# EAGLE board WirelessComm (EAGLE 6.5.0)
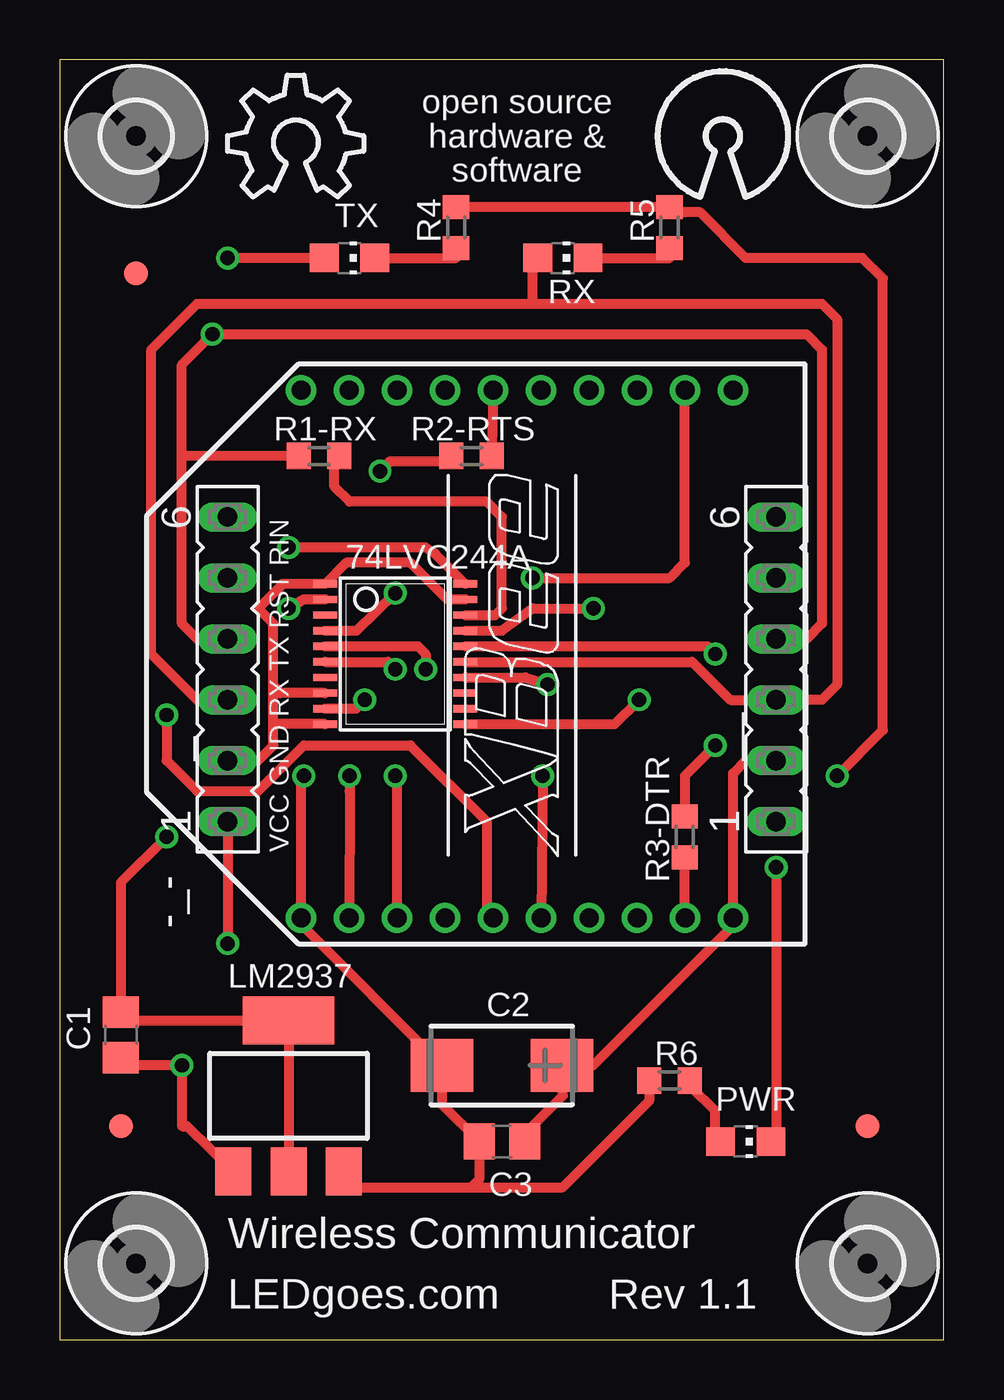
[diagram p0: board, top side]
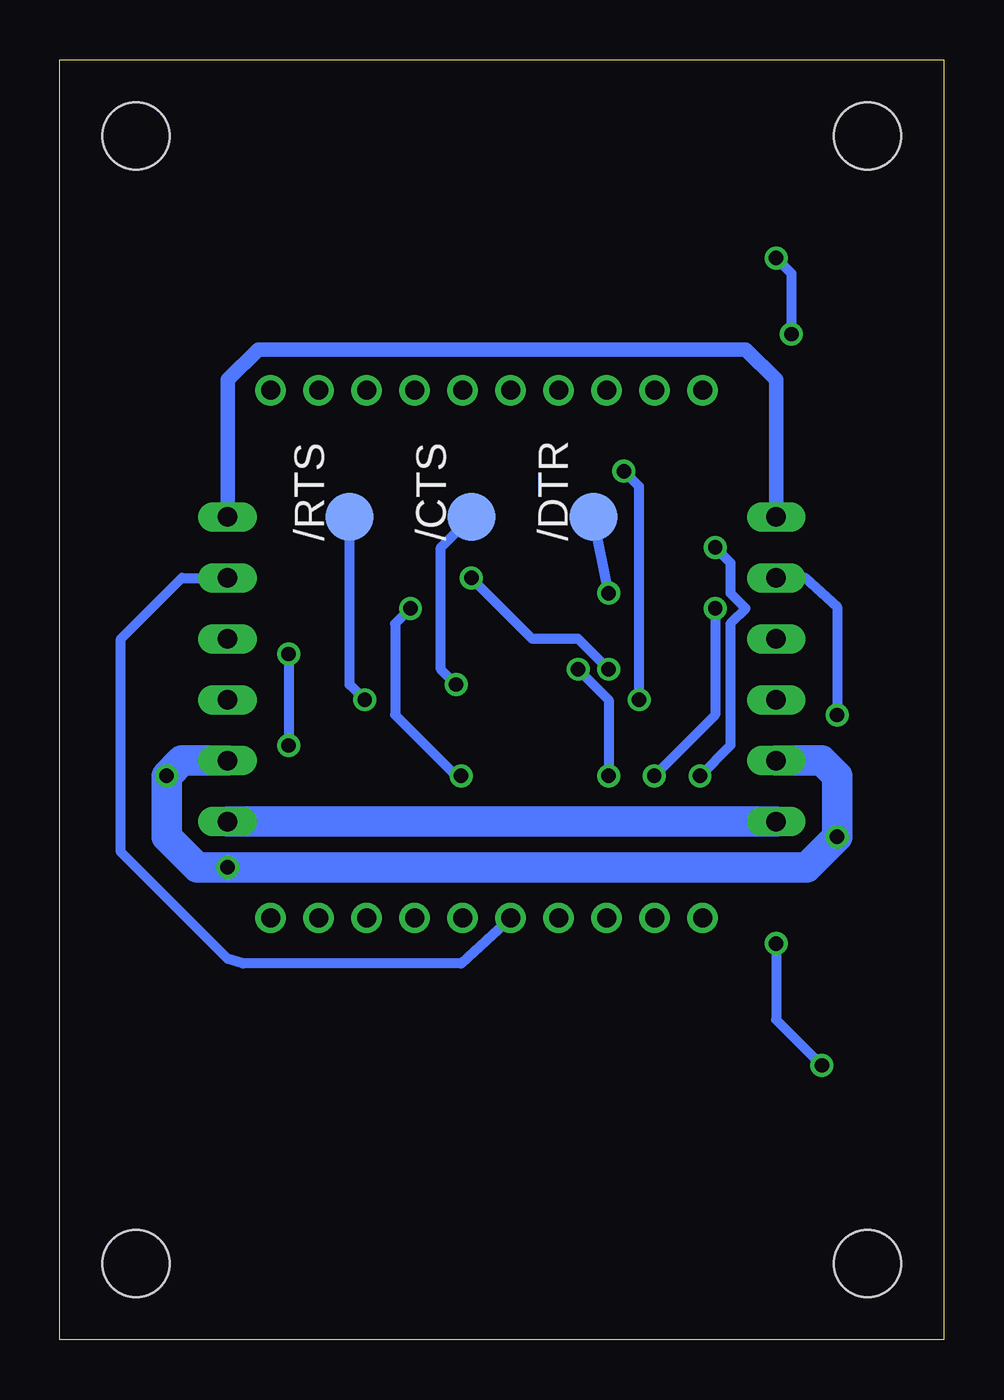
[diagram p1: board, bottom side, seen from below]

Size 36.83 x 53.34 mm. Coordinates in mm from the lower left corner, seen from the top.
Outline: 0,53.34 0,0 36.83,0 36.83,53.34 0,53.34
Copper layers (1*16): Top 0.0356mm / dielectric 1.5011mm / Bottom 0.0356mm
Design rules "LaenPCBOrder *": minimum track width 6mil, minimum drill 13mil, track to track 6mil, track to pad 6mil, pad to pad 6mil, via to via 6mil, smd to smd 6mil, copper to edge 15mil, drill to drill 6mil, minimum pad ring 7mil, minimum via ring 7mil, stop-mask expansion 4mil, vias tented up to drill 0mil, thermal gap 10mil
tKeepout: area 32.2,7.5 to 35.1,10.3; area 1.9,43.2 to 4.4,45.7; area 1.3,7.6 to 3.8,10.2

## Footprints (pad centres in the part's own frame; a part is rotated, then mirrored left to right if it is on the bottom)
TSSOP20 = smd 0.305 x 0.991: 1 -2.925,-2.918; 2 -2.275,-2.918; 3 -1.625,-2.918; 4 -0.975,-2.918; 5 -0.325,-2.918; 6 0.325,-2.918; 7 0.975,-2.918; 8 1.625,-2.918; 9 2.275,-2.918; 10 2.925,-2.918; 11 2.925,2.918; 12 2.275,2.918; 13 1.625,2.918; 14 0.975,2.918; 15 0.325,2.918; 16 -0.325,2.918; 17 -0.975,2.918; 18 -1.625,2.918; 19 -2.275,2.918; 20 -2.925,2.918
XBEE = drill 0.8 pad 1.27: 1 -11,9; 2 -11,7; 3 -11,5; 4 -11,3; 5 -11,1; 6 -11,-1; 7 -11,-3; 8 -11,-5; 9 -11,-7; 10 -11,-9; 11 11,-9; 12 11,-7; 13 11,-5; 14 11,-3; 15 11,-1; 16 11,1; 17 11,3; 18 11,5; 19 11,7; 20 11,9
TP20R = smd 2 x 2: TP 0,0
FE06 = drill 0.813 long: 1 -6.35,0; 2 -3.81,0; 3 -1.27,0; 4 1.27,0; 5 3.81,0; 6 6.35,0
C0805 = smd 1.3 x 1.5: 1 -0.95,0; 2 0.95,0
CT6032 = smd 2.6 x 2.2: + 2.5,0; - -2.5,0
2,8 = hole 2.8: 0,0
FIDUCIAL_1MM = smd 1 x 1: 1 0,0
SOT223 = smd 1.5 x 2: 1 -2.3,-3.15; 2 0,-3.15; 3 2.3,-3.15 | smd 3.8 x 2: 4 0,3.15
CHIP-LED0805 = smd 1.2 x 1.2: A 0,-1.05; C 0,1.05
R0603 = smd 1 x 1.1: 1 -0.85,0; 2 0.85,0

## Placement (x,y rotation side)
74LVC244A  [TSSOP20]  13.97,28.57 270 top
-_-  [XBEE]  19.05,28.57 90 top
/CTS  [TP20R]  19.69,34.29 90 bottom
/DTR  [TP20R]  14.6,34.29 90 bottom
/RTS  [TP20R]  24.77,34.29 90 bottom
_  [FE06]  6.99,27.94 90 top
__  [FE06]  29.84,27.94 90 top
C1  0.1uf  [C0805]  2.54,12.7 90 top
C2  10uf  [CT6032]  18.41,11.43 0 top
C3  0.1uf  [C0805]  18.41,8.25 180 top
E$1  [OSHW_8X200_NOTEXT]  6.99,47.62 0 top
E$2  [2,8]  33.66,50.16 0 top
E$3  [2,8]  3.18,50.16 0 top
E$4  [2,8]  3.18,3.17 0 top
E$5  [2,8]  33.66,3.17 0 top
E$6  [FIDUCIAL_1MM]  3.18,44.45 0 top
E$7  [FIDUCIAL_1MM]  2.54,8.89 0 top
E$8  [FIDUCIAL_1MM]  33.66,8.89 0 top
LM2937  [SOT223]  9.53,10.16 0 top
PWR  [CHIP-LED0805]  28.57,8.25 270 top
R1-RX  1k  [R0603]  10.79,36.83 0 top
R2-RTS  1k  [R0603]  17.15,36.83 0 top
R3-DTR  1k  [R0603]  26.03,20.95 90 top
R4  330  [R0603]  16.51,46.35 90 top
R5  330  [R0603]  25.4,46.35 90 top
R6  330  [R0603]  25.4,10.8 0 top
RX  [CHIP-LED0805]  20.95,45.09 270 top
TX  [CHIP-LED0805]  12.06,45.09 270 top

## Library data of the parts
74LVC244A = mcp2515
-_- = maxstream
/CTS /DTR /RTS = testpad
_ __ = con-lsta
C1 C3 R1-RX R2-RTS R3-DTR R4-R6 = eagle-ltspice
C2 = resistor
E$1 = ohw-logo
E$2-E$5 = holes
E$6-E$8 = adafruit
LM2937 = v-reg
PWR RX TX = led

## Nets
GND: 74LVC244A.1 74LVC244A.8 74LVC244A.10 74LVC244A.19 -_-.10 _.2 __.2 C1.2 C2.+ C3.1 LM2937.2 LM2937.4 PWR.C R4.2 R5.2
S$1: _.6 __.6
S$2: -_-.5 _.5 __.5
S$3: 74LVC244A.20 -_-.1 C2.- C3.2 LM2937.3 R6.1
S$4: 74LVC244A.11 /RTS.TP
S$5: 74LVC244A.14 /CTS.TP
S$6: 74LVC244A.2 -_-.2
S$7: 74LVC244A.18 R1-RX.2
S$8: 74LVC244A.5 -_-.3
S$9: -_-.9 R3-DTR.1
S$10: 74LVC244A.6 -_-.12
S$11: PWR.A R6.2
S$12: -_-.16 R2-RTS.2
S$13: 74LVC244A.9 R2-RTS.1
S$14: R4.1 TX.C
S$15: 74LVC244A.16 R3-DTR.2
S$16: 74LVC244A.17 -_-.6
S$17: 74LVC244A.4 /DTR.TP
S$18: R5.1 RX.C
S$23: 74LVC244A.15 _.3 __.3 RX.A
S$25: _.4 __.4 R1-RX.1 TX.A
VCC: _.1 __.1 C1.1 LM2937.1

## Tracks (layer width: path | path; a pad name or v marks a point on that pad's centre or on a via)
GND  (via drill 0.6)
  Top 0.406: v29.84,19.68 29.84,8.25 PWR.C | v32.38,23.49 34.29,25.4 34.29,44.23 33.44,45.09 28.57,45.09 26.67,46.99 26.03,46.99 R5.2 R4.2 | LM2937.2 LM2937.4 2.88,13.31 C1.2 2.54,19.05 v4.45,20.95 | 74LVC244A.10 8.89,25.65 | 74LVC244A.8 9.17,26.95 8.89,27.3 | 74LVC244A.19 16.14,30.85 14.6,32.38 11.94,32.38 74LVC244A.1 9.28,31.5 8.26,30.48 8.89,29.84 8.89,27.3 | _.2 8.26,24.13 8.89,24.77 8.89,25.65 | 8.89,25.65 8.89,27.3 | __.2 28.57,24.13 28.05,23.61 -_-.10 28.05,17.25 22.23,11.43 C2.+ 20.95,11.39 20.95,10.16 19.37,8.57 C3.1 19.69,8.25
  Bottom 1.27: _.2 5.08,24.13 4.45,23.49 v4.45,20.95 5.71,19.68 v29.84,19.68 31.12,19.68 32.38,20.95 v32.38,23.49 31.75,24.13 __.2
S$1
  Bottom 0.61: _.6 6.99,40.01 8.26,41.27 28.57,41.27 29.84,40.01 __.6
S$2  (via drill 0.6)
  Top 0.406: v4.45,26.04 4.45,24.13 5.71,22.86 8.26,22.86 10.16,24.77 14.6,24.77 17.78,21.59 17.78,17.78 -_-.5
  Bottom 0.406: _.5 5.78,31.75 4.45,30.54 v4.45,26.04 | -_-.5 20.12,15.67 29.21,15.67 29.84,15.88 34.29,20.32 34.29,29.21 31.75,31.75 __.5
S$3  (via drill 0.6)
  Top 0.406: 74LVC244A.20 15.63,32.77 15.24,33.02 v9.53,33.02 | v10.16,23.49 10.05,23.38 -_-.1 10.05,17.3 C2.- 15.92,9.8 C3.2 17.47,6.67 17.15,6.35 | R6.1 24.55,9.95 20.95,6.35 17.15,6.35 | LM2937.3 12.06,6.35 17.15,6.35
  Bottom 0.406: v9.53,33.02 8.89,32.38 8.89,31.11 8.26,30.48 8.89,29.84 8.89,24.77 v10.16,23.49
S$4  (via drill 0.6)
  Top 0.406: 74LVC244A.11 23.11,25.65 v24.13,26.67
  Bottom 0.406: v24.13,26.67 24.77,27.3 /RTS.TP
S$5  (via drill 0.6)
  Top 0.406: 74LVC244A.14 19.39,27.6 v20.32,27.3
  Bottom 0.406: v20.32,27.3 20.95,27.94 20.95,33.02 /CTS.TP
S$6  (via drill 0.6)
  Top 0.406: 74LVC244A.2 10.16,30.85 v9.53,30.48 | v12.06,23.49 12.06,22.86 -_-.2
  Bottom 0.406: v9.53,30.48 9.53,26.04 v12.06,23.49
S$7
  Top 0.406: 74LVC244A.18 18.13,30.2 18.41,30.48 18.41,34.29 17.78,34.92 12.06,34.92 11.43,35.56 11.43,36.83 R1-RX.2
S$8  (via drill 0.6)
  Top 0.406: 74LVC244A.5 14.92,28.9 15.24,28.57 v15.24,27.94 | -_-.3 14.05,23.41 v13.97,23.49
  Bottom 0.406: v15.24,27.94 13.97,26.67 v13.97,23.49
S$9
  Top 0.406: -_-.9 26.03,17.78 R3-DTR.1
S$10  (via drill 0.6)
  Top 0.406: 74LVC244A.6 13.66,28.25 v13.97,27.94 | v19.69,31.75 25.4,31.75 26.03,32.38 26.03,39.37 25.84,39.37 -_-.12
  Bottom 0.406: v13.97,27.94 15.24,29.21 17.15,29.21 v19.69,31.75
S$11
  Top 0.406: R6.2 26.25,10.58 27.3,9.53 27.3,8.25 PWR.A
S$12
  Top 0.406: -_-.16 17.99,37.2 R2-RTS.2
S$13  (via drill 0.6)
  Top 0.406: 74LVC244A.9 12.33,26.3 v12.7,26.67 | v13.33,36.2 13.76,36.62 15.88,36.62 R2-RTS.1
  Bottom 0.406: v12.7,26.67 12.7,35.56 v13.33,36.2
S$14
  Top 0.406: TX.C 16.51,45.09 R4.1
S$15  (via drill 0.6)
  Top 0.406: 74LVC244A.16 26.98,28.9 v27.3,28.57 | v27.3,24.77 26.03,23.49 R3-DTR.2
  Bottom 0.406: v27.3,28.57 v27.3,24.77
S$16  (via drill 0.6)
  Top 0.406: 74LVC244A.17 18.41,29.55 19.69,30.48 v22.23,30.48 | v20.12,23.49 -_-.6
  Bottom 0.406: v22.23,30.48 22.86,29.84 22.86,26.04 20.32,23.49 v20.12,23.49
S$17  (via drill 0.6)
  Top 0.406: 74LVC244A.4 12.36,29.55 v13.97,31.11
  Bottom 0.406: v13.97,31.11 /DTR.TP
S$18
  Top 0.406: RX.C 25.4,45.09 R5.1
S$23
  Top 0.406: _.3 5.71,26.67 3.81,28.57 3.81,41.27 5.71,43.18 19.69,43.18 | 19.69,43.18 31.75,43.18 32.38,42.55 32.38,27.3 31.75,26.67 __.3 27.94,26.67 26.34,28.25 74LVC244A.15 | RX.A 19.69,45.09 19.69,43.18
S$25  (via drill 0.6)
  Top 0.406: _.4 5.71,29.21 5.08,29.84 5.08,36.83 | 5.08,36.83 5.08,40.64 v6.35,41.91 31.12,41.91 31.75,41.27 31.75,29.84 31.12,29.21 __.4 | R1-RX.1 5.08,36.83 | TX.A v6.99,45.09
  Bottom 0.406: v6.99,45.09 6.35,44.45 v6.35,41.91
VCC  (via drill 0.6)
  Top 0.406: _.1 v6.99,16.51 | C1.1 2.86,11.43 v5.08,11.43 5.08,8.89 5.29,8.89 LM2937.1
  Bottom 0.406: v6.99,16.51 6.99,13.34 v5.08,11.43
  Bottom 1.27: _.1 __.1

## Text on the board
tNames: open source / hardware & / software | VCC GND RX TX RST RIN | Wireless Communicator | LEDgoes.com | Rev 1.1